# Altium PCB PCB1Good1.PcbDoc (part 1 of 2)
Units mm, origin at the board's own origin, x right, y up, seen from the top; angles counter-clockwise.
Board outline 152.4 x 101.6 mm, 2 copper layers (Top Layer, Bottom Layer); 118 components, 130 nets, 525 pads, 93 vias.
Unrouted connection lines stored in the file: 31.
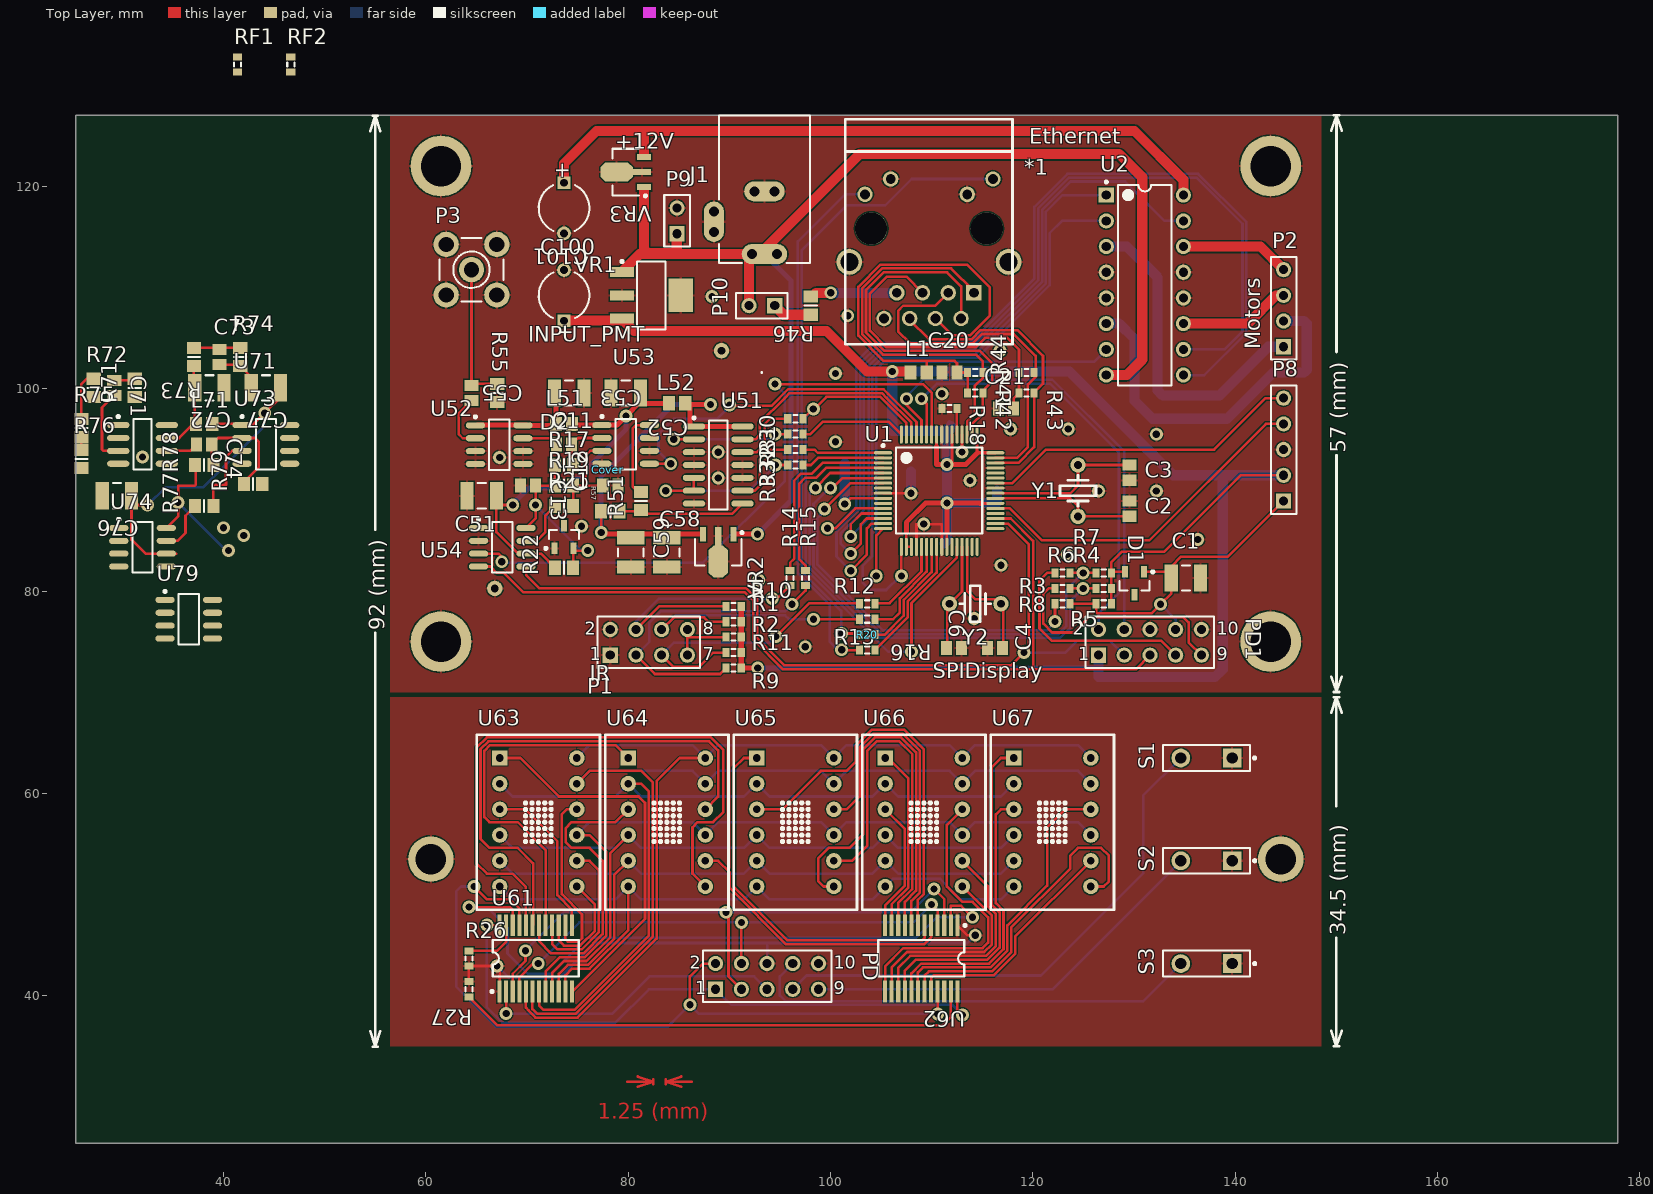
[diagram p0: Top Layer view]
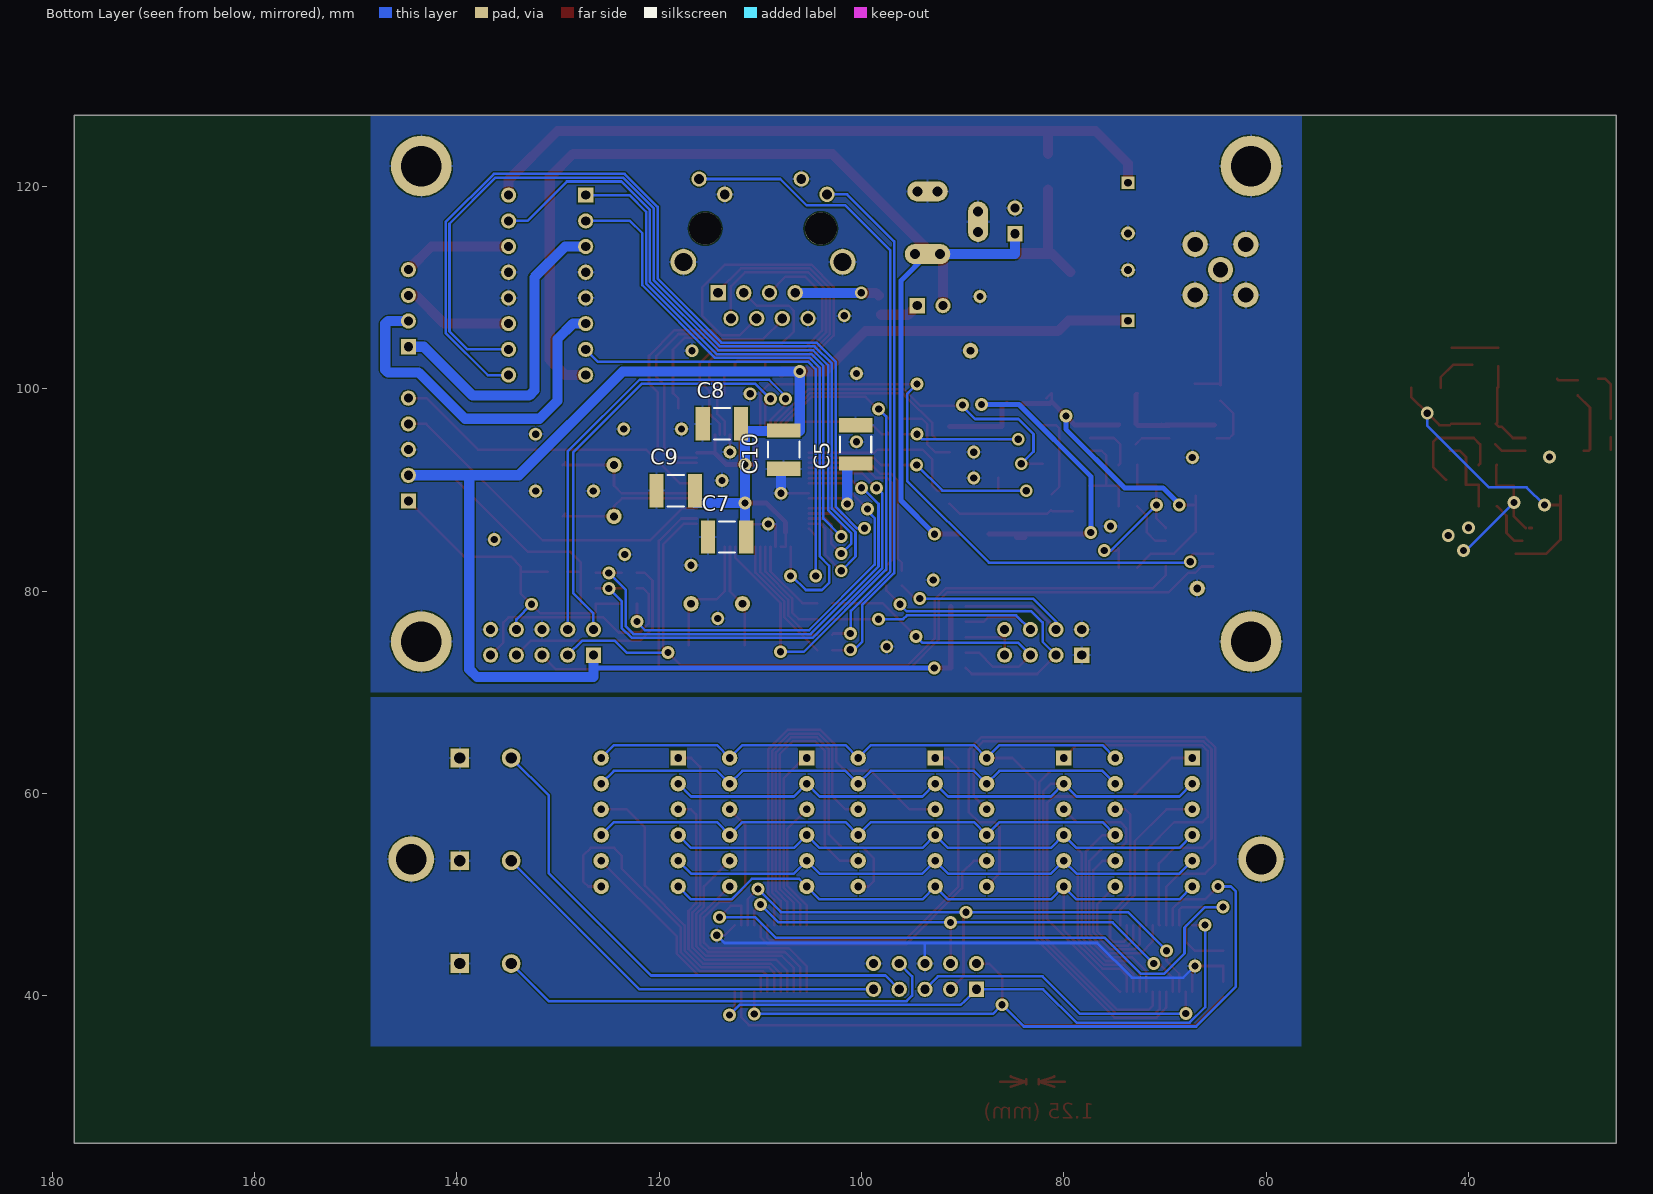
[diagram p1: Bottom Layer view, seen from below]

## Layer stack, top to bottom
Top Layer: signal copper 0.0356
Dielectric: dielectric 0.32, FR-4, Dk 4.8
Bottom Layer: signal copper 0.0356

## Board outline
25.4,25.4 177.8,25.4 177.8,127 25.4,127

## Design rules (kind name [scope] priority, off if disabled: settings)
Clearance [All] p1: gap=0.127
PolygonConnect [All] p1: connectstyle=Relief reliefconductorwidth=0.254 reliefentries=4 polygonreliefangle="90 Angle"
RoutingVias [All] p1: holewidth=0.711 width=1.27 viastyle="Through Hole" minholewidth=0.711 minwidth=1.27 maxholewidth=0.711 maxwidth=1.27
SilkscreenOverComponentPads [All] p1: minsilkscreentomaskgap=0.254
SolderMaskExpansion [All] p1: expansion=0.102
Width [All] p1: maxlimit=2.54 minlimit=0.254 preferedwidth=0.254
27 further rules are at their usual default settings.

## Classes and differential pairs
component class Sheet1: * *1 *2 *3 *4 *5 *6 *7 *8 C1 C2 C3 C4 C5 C6 C7 C8 C9 C10 C11 C12 C13 C51 C52 C53 C55 C58 C59 C100 C101 D1 D2 J1 J2 L51 L52 P1 P2 P3 P8 Q1 Q2 R1 R2 R3 R4 R5 R6 R7 R8 R9 R10 R11 R12 R13 R14 R15 R16 R17 R18 R19 R20 R21 R22 R23 R24 R25 R51 R55 R57 U1 U2 U3 U4 U51 U52 U53 U54 VR1 VR2 VR3 Y1 Y2

## Components (designator, comment, footprint, x,y, rotation, side; value= is the part's Value field where it differs from the comment)
*1 "Component_1" EthernetCON 109.728,115.824 r90 top
C1 "Cap" CAPC3225N 135.128,81.28 r180 top
C2 "Cap" CAPC2012L 129.54,88.138 r270 top
C3 "Cap" CAPC2012L 129.54,91.694 r270 top
C4 "Cap" CAPC2012L 116.259,74.357 r180 top
C5 "Cap" CAPC4532L 100.584,94.488 r90 bottom
C6 "Cap" CAPC2012L 112.195,74.357 r180 top
C7 "Cap" CAPC4532L 113.284,85.344 r180 bottom
C8 "Cap" CAPC4532L 113.792,96.52 r180 bottom
C9 "Cap" CAPC4532L 118.364,89.916 r180 bottom
C10 "Cap" CAPC4532L 107.696,93.98 r90 bottom
C11 "Cap" CAPC2012L 73.66,94.488 r0 top
C12 "Cap" CAPC2012L 78.232,90.424 r180 top
C13 "Cap" CAPC2012L 70.104,90.424 r0 top
C20 "Cap" CAPC2012L 111.76,101.6 r0 top
C21 "Cap" CAPC2012L 117.348,98.044 r0 top
C51 "Cap Pol1" CAPC3225N 65.532,89.408 r180 top
C52 "Cap" CAPC3225N 79.756,99.568 r180 top
C53 "Cap" CAPC3225N 74.168,99.568 r180 top
C55 "Cap" CAPC2012L 64.516,99.568 r270 top
C58 "Cap" CAPC3225N 83.82,83.82 r90 top
C59 "Cap Pol1" CAPC3225N 80.264,83.82 r270 top
C71 "Cap" CAPC2012L 29.206,100.076 r270 top
C72 "Cap" CAPC3225N 38.608,100.076 r180 top
C73 "Cap" CAPC2012L 39.624,103.124 r90 top
C74 "Cap" CAPC2012L 38.1,94.488 r0 top
C76 "Cap Pol1" CAPC3225N 29.464,89.408 r180 top
C77 "Cap" CAPC3225N 44.196,100.076 r180 top
C100 "Cap Pol1" CAPPR5-5x5 73.66,109.22 r90 top
C101 "Cap Pol1" CAPPR5-5x5 73.66,117.856 r270 top
Cover "Cover" Cover 77.724,92.456 r0 top
D1 "Diode" SOT95P240-3N 130.048,80.772 r270 top
D2 "AD1580" SOT95P240-3N 73.66,85.344 r90 top
J1 "PWR2.5" KLD-0202 93.472,127 r270 top
L1 "Inductor" INDC2012L 108.712,101.6 r0 top
L51 "Inductor" INDC2012L 73.66,96.52 r0 top
L52 "Inductor" INDC2012L 84.836,98.552 r0 top
L71 "Inductor" INDC2012L 38.1,96.52 r0 top
P1 "Header 4X2" HDR2X4 78.232,73.66 r0 top
P2 "Header 4" HDR1X4 144.78,104.14 r90 top
P3 "SMB" SMB_V-RJ45 64.516,111.76 r0 top
P8 "Header 5" HDR1X5 144.78,88.9 r90 top
P9 "Header 2" HDR1X2 84.836,115.316 r90 top
P10 "Header 2" HDR1X2 94.488,108.204 r180 top
PD "Header 5X2" HDR2X5 88.646,40.64 r0 top
PD1 "Header 5X2" HDR2X5 126.492,73.66 r0 top
R1 "Res3" RESC1608L 90.424,78.486 r0 top
R2 "Res3" RESC1608L 90.424,76.962 r0 top
R3 "Res3" RESC1608L 122.936,80.264 r180 top
R4 "Res3" RESC1608L 127,80.264 r0 top
R5 "Res3" RESC1608L 127,78.74 r0 top
R6 "Res3" RESC1608L 122.936,81.788 r0 top
R7 "Res3" RESC1608L 127,81.788 r0 top
R8 "Res3" RESC1608L 122.936,78.74 r0 top
R9 "Res3" RESC1608L 90.424,72.39 r0 top
R10 "Res3" RESC1608L 90.424,73.914 r0 top
R11 "Res3" RESC1608L 90.424,75.438 r0 top
R12 "Res3" RESC1608L 103.632,78.74 r0 top
R13 "Res3" RESC1608L 103.632,77.216 r0 top
R14 "Res3" RESC1608L 96.012,81.28 r90 top
R15 "Res3" RESC1608L 97.536,81.28 r90 top
R16 "Res3" RESC1608L 103.632,74.168 r0 top
R17 "Res2" RESC2012N 73.66,92.456 r0 top
R18 "Res3" RESC1608L 111.76,98.044 r0 top
R19 "Res2" RESC2012N 73.66,90.424 r0 top
R20 "Res3" RESC1608L 103.632,75.692 r0 top
R21 "Res2" RESC2012N 73.66,88.392 r0 top
R22 "Res2" RESC2012N 73.66,82.296 r180 top
R26 "Res3" RESC1608L 64.262,43.688 r90 top
R27 "Res3" RESC1608L 64.262,40.64 r270 top
R30 "" RESC1608L 96.52,97.028 r180 top
R31 "" RESC1608L 96.52,95.504 r180 top
R32 "" RESC1608L 96.52,93.98 r180 top
R33 "" RESC1608L 96.52,92.456 r180 top
R41 "Res3" RESC1608L 114.3,101.6 r0 top
R42 "Res3" RESC1608L 114.3,99.568 r0 top
R43 "Res3" RESC1608L 119.38,99.568 r0 top
R44 "Res3" RESC1608L 119.38,101.6 r180 top
R46 "Res3" RESC2012N 98.044,108.204 r270 top
R51 "Res2" RESC2012N 81.28,88.9 r90 top
R55 "Res2" RESC2012N 67.056,99.568 r90 top
R57 "Res2" RESC2012N 78.232,87.884 r0 top
R71 "Res2" RESC2012N 31.238,100.076 r90 top
R72 "Res2" RESC2012N 27.174,100.076 r90 top
R73 "Res2" RESC2012N 37.084,103.124 r270 top
R74 "Res2" RESC2012N 41.656,103.124 r90 top
R75 "Res2" RESC2012N 25.958,96.108 r90 top
R76 "Res2" RESC2012N 25.958,93.06 r90 top
R77 "Res2" RESC2012N 38.1,88.392 r180 top
R78 "Res2" RESC2012N 38.1,92.456 r180 top
R79 "Res2" RESC2012N 42.935,90.571 r180 top
RF1 "Res3" RESC1608L 41.405,132.046 r90 top
RF2 "Res3" RESC1608L 46.655,132.046 r90 top
S1 "SW-PB" SPST-2 137.16,63.5 r180 top
S2 "SW-PB" SPST-2 137.16,53.34 r180 top
S3 "SW-PB" SPST-2 137.16,43.18 r180 top
U1 "PIC18F67J60-I/PT" TQFP-PT64_N 110.744,89.916 r0 top
U2 "SN754410NE" NE016 131.064,110.236 r0 top
U51 "SN74S197D" D014_N 88.9,92.456 r0 top
U52 "SA5205A" SOIC127P600-8L 67.252,94.465 r0 top
U53 "AD8561" SOIC127P600-8L 79.756,94.488 r0 top
U54 "AD8400" SOIC127P600-8L 67.564,84.328 r0 top
U61 "STP16C596" DB024 70.866,43.688 r0 top
U62 "STP16C596" DB024 108.966,43.688 r180 top
U63 "BL-M07A571" "LED matrix 7x5" 67.31,63.5 r0 top
U64 "BL-M07A571" "LED matrix 7x5" 80.01,63.5 r0 top
U65 "BL-M07A571" "LED matrix 7x5" 92.71,63.5 r0 top
U66 "BL-M07A571" "LED matrix 7x5" 105.41,63.5 r0 top
U67 "BL-M07A571" "LED matrix 7x5" 118.11,63.5 r0 top
U71 "AD8001AR" SO-8_N 32.004,94.488 r0 top
U73 "AD8561" SOIC127P600-8L 44.196,94.488 r0 top
U74 "AD8400" SOIC127P600-8L 32.004,84.328 r0 top
U79 "AD8400" SOIC127P600-8L 36.576,77.216 r0 top (schematic designator U74)
VR1 "Volt Reg" SOT223-4N 82.296,109.22 r0 top
VR2 "Volt Reg" SOT89N#1 88.9,83.82 r270 top
VR3 "Volt Reg" SOT89N#2 79.756,121.412 r180 top
Y1 "XTAL" Quartz 124.46,92.456 r270 top
Y2 "Z" Quartz 116.84,78.74 r180 top

## Footprints (in the part's own frame and the unit in brackets; to place one, negate y for a bottom-side part, rotate by r counter-clockwise, add the part's x,y. Pads: shape width x height; smd on the part's side, far side on the other; paste and mask are expansions set on the pad)
CAPC2012L [mm] "Chip Capacitor, Body 2.0x1.3mm, IPC High Density"
  rect 1.1x1.4 smd: 1(-0.75,0) 2(0.75,0)
  body extent -1.1,-0.72 1.1,0.72, height 1.4
CAPC3225N [mm] "Chip Capacitor, Body 3.2x2.5mm, IPC Medium Density"
  rect 1.3x2.7 smd: 1(-1.45,0) 2(1.45,0)
  silkscreen extent -0.4,-1.25 0.4,1.25, body extent -1.7,-1.35 1.7,1.35, height 1.5
CAPC4532L [mm] "Chip Capacitor, Body 4.5x3.2mm, IPC High Density"
  rect 1.4x3.3 smd: 1(-1.9,0) 2(1.9,0)
  silkscreen extent -0.8,-1.55 0.8,1.55, body extent -2.4,-1.7 2.4,1.7, height 1.4
CAPPR5-5x5 [mm] "Capacitor, Electrolytic, Radial; Body 5 x 5 mm (Dia.xH typ); Pin Spacing 5 mm (typ)"
  rect 1.25x1.25 hole 0.75: 1(-2.5,0)
  round 1.35 hole 0.8: 2(2.5,0)
  silkscreen extent -2.26,-2.5 2.27,2.5
Cover [mil]
  round 60 hole 30: 0(-429.13,-480.32) 1(452.76,444.88)
  body extent -626,-486 646,453, height 181
D014_N [mm] "SOIC, 14-Leads, Body 8.7x3.9mm, Pitch 1.27mm, IPC Medium Density"
  oval 2.2x0.6 smd: 1(-2.4,3.81) 2(-2.4,2.54) 3(-2.4,1.27) 4(-2.4,0) 5(-2.4,-1.27) 6(-2.4,-2.54) 7(-2.4,-3.81) 8(2.4,-3.81) 9(2.4,-2.54) 10(2.4,-1.27) 11(2.4,0) 12(2.4,1.27) 13(2.4,2.54) 14(2.4,3.81)
  silkscreen extent -2.52,-4.4 0.9,4.78, body extent -2,-4.38 2,4.38, height 1.75
DB024 [mm] "SSOP, Plastic; 24 Leads; Body Width 5.3 mm; Pitch 0.65 mm"
  rect 0.4x2.15 smd: 1(-3.575,-3.275) 2(-2.925,-3.275) 3(-2.275,-3.275) 4(-1.625,-3.275) 5(-0.975,-3.275) 6(-0.325,-3.275) 7(0.325,-3.275) 8(0.975,-3.275) 9(1.625,-3.275) 10(2.275,-3.275) 11(2.925,-3.275) 12(3.575,-3.275) 13(3.575,3.275) 14(2.925,3.275) 15(2.275,3.275) 16(1.625,3.275) 17(0.975,3.275) 18(0.325,3.275) 19(-0.325,3.275) 20(-0.975,3.275) 21(-1.625,3.275) 22(-2.275,3.275) 23(-2.925,3.275) 24(-3.575,3.275)
  silkscreen extent -4.45,-3.4 4.25,1.8
EthernetCON [mil] "Ethernet connector w/two LEDs"
  rect 60x60 hole 38: 1(-250,-175)
  round 60 hole 38: 2(-350,-125) 3(-250,-75) 4(-350,-25) 5(-250,25) 6(-350,75) 7(-250,125) 8(-350,175) 9(193,-249) 10(133,-149) 11(193,149) 12(133,249)
  round 100 hole 70: 13(-130,-310) 14(-130,310)
  round 125 hole 125 unplated: 15(0,-225) 16(0,225)
  silkscreen extent -450,-325 425,325, body extent -450,-325 425,325, height 550
HDR1X2 [mm] "Connector; Header; 2 Position"
  rect 1.5x1.5 hole 0.9: 1(0,0)
  round 1.5 hole 0.9: 2(2.54,0)
  silkscreen extent -1.27,-1.27 3.81,1.27
HDR1X4 [mm] "Connector; Header; 4 Position"
  rect 1.5x1.5 hole 0.9: 1(0,0)
  round 1.5 hole 0.9: 2(2.54,0) 3(5.08,0) 4(7.62,0)
  silkscreen extent -1.27,-1.27 8.89,1.27
HDR1X5 [mm] "Connector; Header; 5 Position"
  rect 1.5x1.5 hole 0.9: 1(0,0)
  round 1.5 hole 0.9: 2(2.54,0) 3(5.08,0) 4(7.62,0) 5(10.16,0)
  silkscreen extent -1.27,-1.27 11.43,1.27
HDR2X4 [mm] "Connector; Header; 4x2 Position"
  rect 1.5x1.5 hole 0.9: 1(0,0)
  round 1.5 hole 0.9: 2(0,2.54) 3(2.54,0) 4(2.54,2.54) 5(5.08,0) 6(5.08,2.54) 7(7.62,0) 8(7.62,2.54)
  silkscreen extent -1.27,-1.27 8.89,3.81
HDR2X5 [mm] "Connector; Header; 5x2 Position"
  rect 1.5x1.5 hole 0.9: 1(0,0)
  round 1.5 hole 0.9: 2(0,2.54) 3(2.54,0) 4(2.54,2.54) 5(5.08,0) 6(5.08,2.54) 7(7.62,0) 8(7.62,2.54) 9(10.16,0) 10(10.16,2.54)
  silkscreen extent -1.27,-1.27 11.43,3.81
INDC2012L [mm] "Chip Inductor, Body 2.0x1.2mm, IPC High Density"
  rect 1.2x1.4 smd: 1(-0.8,0) 2(0.8,0)
  body extent -1.1,-0.7 1.1,0.7, height 0.55
KLD-0202 [mm] "DC Power Jack, 2.5mm, KLD Series, PCB Mount"
  oval 2x4.5 all layers, no hole: 1(13.7,0)
  round 1.5 hole 1: 1A(13.7,-1.25) 1B(13.7,1.25) 2A(7.5,-1) 2B(7.5,1) 3A(9.5,-5) 3B(11.5,-5)
  oval 2x4 all layers, no hole: 2(7.5,0)
  oval 4x2 all layers, no hole: 3(10.5,-5)
  silkscreen extent 0,-4.5 14.6,4.5
"LED matrix 7x5" [mil] "LED matrix 7x5"
  rect 60x60 hole 30: 1(0,0)
  round 60 hole 30: 2(0,-100) 3(0,-200) 4(0,-300) 5(0,-400) 6(0,-500) 7(300,-500) 8(300,-400) 9(300,-300) 10(300,-200) 11(300,-100) 12(300,0)
  silkscreen extent -90,-590 390,90, body extent -90,-590 390,90, height 250
NE016 [mm] "DIP, 16-Leads, Row Spacing 7.62mm, Pitch 2.54mm, Body 19.4x6.35mm"
  rect 1.5x1.5 hole 0.9: 1(-3.81,8.89)
  round 1.5 hole 0.9: 2(-3.81,6.35) 3(-3.81,3.81) 4(-3.81,1.27) 5(-3.81,-1.27) 6(-3.81,-3.81) 7(-3.81,-6.35) 8(-3.81,-8.89) 9(3.81,-8.89) 10(3.81,-6.35) 11(3.81,-3.81) 12(3.81,-1.27) 13(3.81,1.27) 14(3.81,3.81) 15(3.81,6.35) 16(3.81,8.89)
  silkscreen extent -3.93,-9.9 2.65,10.31, body extent -3.3,-9.9 3.3,9.9, height 5.08
Quartz [mil]
  round 60 hole 30: 1(0,0) 2(200,0)
  silkscreen extent 40,-70 160,70, body extent -100,-100 300,100, height 90
RESC1608L [mm] "Chip Resistor, Body 1.6x0.8mm, IPC High Density"
  rect 0.7x0.9 smd: 1(-0.75,0) 2(0.75,0)
  silkscreen extent -0.2,-0.35 0.2,0.35, body extent -0.85,-0.48 0.85,0.48, height 0.9
RESC2012N [mm] "Chip Resistor, Body 2.0x1.2mm, IPC Medium Density"
  rect 1.2x1.4 smd: 1(-0.9,0) 2(0.9,0)
  silkscreen extent 0,-0.6 0,0.6, body extent -1.07,-0.7 1.07,0.7, height 0.7
SMB_V-RJ45 [mm] "Connector; SMB Straight"
  round 2.5 hole 1.5: 1(0,0) 2(-2.5,-2.5) 2_1(2.5,-2.5) 2_2(2.5,2.5) 2_3(-2.5,2.5)
  silkscreen extent -3.15,-3.15 3.15,3.15
SO-8_N [mm] "SOIC, 8-Leads, Body 4.9x3.9mm, Pitch 1.27mm, IPC Medium Density"
  oval 2.2x0.6 smd: 1(-2.4,1.905) 2(-2.4,0.635) 3(-2.4,-0.635) 4(-2.4,-1.905) 5(2.4,-1.905) 6(2.4,-0.635) 7(2.4,0.635) 8(2.4,1.905)
  silkscreen extent -2.52,-2.5 0.9,2.88, body extent -1.95,-2.45 1.95,2.45, height 1.75
SOIC127P600-8L [mm] "SOIC, 8-Leads, Body 4.9x3.9mm, Pitch 1.27mm, IPC High Density"
  oval 1.9x0.6 smd: 1(-2.35,1.905) 2(-2.35,0.635) 3(-2.35,-0.635) 4(-2.35,-1.905) 5(2.35,-1.905) 6(2.35,-0.635) 7(2.35,0.635) 8(2.35,1.905)
  silkscreen extent -2.47,-2.5 1,2.88, body extent -2,-2.5 2,2.5, height 1.75
SOT89N#1 [mm] "SOT89, 3-Leads, Body 4.5x2.4 mm, Pitch 1.5mm, Lead Span 4.1mm, IPC Medium Density"
  rect 1.4x0.6 smd: 1(-1.8,1.5) 3(-1.8,-1.5)
  rect 1.8x0.6 smd: 2(-1.6,0)
  oct 3.2x1.9 smd: 2_1(0.9,0)
  silkscreen extent -2.07,-2.3 1.3,2.48, body extent -1.3,-2.3 1.3,2.3, height 1.6
SOT89N#2 [mm] "SOT89, 3-Leads, Body 4.5x2.4 mm, Pitch 1.5mm, Lead Span 4.1mm, IPC Medium Density"
  rect 1.4x0.6 smd: 1(-1.8,1.5) 3(-1.8,-1.5)
  oct 3.2x1.9 smd: 2(0.9,0)
  rect 1.8x0.6 smd: 2_1(-1.6,0)
  silkscreen extent -2.07,-2.3 1.3,2.47, body extent -1.3,-2.3 1.3,2.3, height 1.6
SOT95P240-3N [mm] "SOT23, 3-Leads, Body 2.9x1.3mm, Pitch 0.95mm, Lead Span 2.4mm, IPC Medium Density"
  rect 1.15x0.6 smd: 1(-1.125,0.95) 2(-1.125,-0.95) 3(1.125,0)
  silkscreen extent -1.25,-1.5 0.7,1.93, body extent -0.7,-1.5 0.7,1.5, height 1.14
SOT223-4N [mm] "SOT223, 4-Leads, Body 6.5x3.5mm, Pitch 2.3mm, Lead Span 7mm, IPC Medium Density"
  rect 2.4x1 smd: 1(-2.9,2.3) 2(-2.9,0) 3(-2.9,-2.3)
  rect 2.4x3.3 smd: 4(2.9,0)
  silkscreen extent -3.02,-3.35 1.4,3.47, body extent -1.85,-3.35 1.85,3.35, height 1.7
SPST-2 [mm] "Circuit Breaker; 2 Leads"
  rect 1.85x1.85 hole 1.1: 1(-2.54,0)
  round 1.85 hole 1.1: 2(2.54,0)
  silkscreen extent -4.89,-1.27 4.28,1.27
TQFP-PT64_N [mm] "Thin QFP, 64-Leads, Body 10x10mm, Pitch 0.5mm, IPC Medium Density"
  oval 1.8x0.3 smd: 1(-5.55,3.75) 2(-5.55,3.25) 3(-5.55,2.75) 4(-5.55,2.25) 5(-5.55,1.75) 6(-5.55,1.25) 7(-5.55,0.75) 8(-5.55,0.25) 9(-5.55,-0.25) 10(-5.55,-0.75) 11(-5.55,-1.25) 12(-5.55,-1.75) 13(-5.55,-2.25) 14(-5.55,-2.75) 15(-5.55,-3.25) 16(-5.55,-3.75) 33(5.55,-3.75) 34(5.55,-3.25) 35(5.55,-2.75) 36(5.55,-2.25) 37(5.55,-1.75) 38(5.55,-1.25) 39(5.55,-0.75) 40(5.55,-0.25) 41(5.55,0.25) 42(5.55,0.75) 43(5.55,1.25) 44(5.55,1.75) 45(5.55,2.25) 46(5.55,2.75) 47(5.55,3.25) 48(5.55,3.75)
  oval 0.3x1.8 smd: 17(-3.75,-5.55) 18(-3.25,-5.55) 19(-2.75,-5.55) 20(-2.25,-5.55) 21(-1.75,-5.55) 22(-1.25,-5.55) 23(-0.75,-5.55) 24(-0.25,-5.55) 25(0.25,-5.55) 26(0.75,-5.55) 27(1.25,-5.55) 28(1.75,-5.55) 29(2.25,-5.55) 30(2.75,-5.55) 31(3.25,-5.55) 32(3.75,-5.55) 49(3.75,5.55) 50(3.25,5.55) 51(2.75,5.55) 52(2.25,5.55) 53(1.75,5.55) 54(1.25,5.55) 55(0.75,5.55) 56(0.25,5.55) 57(-0.25,5.55) 58(-0.75,5.55) 59(-1.25,5.55) 60(-1.75,5.55) 61(-2.25,5.55) 62(-2.75,5.55) 63(-3.25,5.55) 64(-3.75,5.55)
  silkscreen extent -5.67,-4.25 4.25,4.57, body extent -5,-5 5,5, height 1.2

## Part data
C1 C2 C3 C4 C5 C6 C7 C8 C9 C10 C11 C12 C13 C20 C21 C52 C53 C55 C58 C71 C72 C73 C74 C77: "Capacitor"
C51 C59 C76 C100 C101: "Polarized Capacitor (Radial)"
Cover: library part Component_1
D1: "Default Diode"
D2: library part "D Zener", "Zener Diode"
J1: "Low Voltage Power Supply Connector"
P1: "Header, 4-Pin, Dual row"
P2: "Header, 4-Pin"
P3: "SMB Straight Connector"
P8: "Header, 5-Pin"
P9 P10: "Header, 2-Pin"
PD PD1: "Header, 5-Pin, Dual row"
R1 R2 R3 R4 R5 R6 R7 R8 R9 R10 R11 R12 R13 R14 R15 R16 R17 R18 R19 R20 R21 R22 R26 R27 R41 R42 R43 R44 R46 R51 R55 R57 R71 R72 R73 R74 R75 R76 R77 R78 R79 RF1 RF2: "Resistor"
R30 R31 R32 R33: library part Res3, "Resistor"
S1 S2 S3: "Switch"
U1: "High Performance, 1-Mbit Flash Microcontroller with Ethernet, 128K Flash, 64-Pin TQFP, Industrial Temperature Range"
U2: "Quadruple Half-H Driver"
U51: "100-MHz Presettable Decade or Binary Counter / Latch"
U52: "Wide-band high-frequency amplifier"
U53 U73: "Ultrafast 7 ns  Single Supply Comparator"
U54 U74 U79: "Digital Potentiometers"
U71: "800MHz, 50mW Current Feedback Amplifier"
VR1 VR2 VR3: "Voltage Regulator"
Y1: "Crystal Oscillator"
Y2: library part XTAL, "32768 kHz"

## Free pads (board coordinates)
  round 4.5 hole 3: 0(60.5,53.5) 0(144.5,53.5)
  round 6 hole 4: 0(61.5,75) 0(61.5,122) 0(143.5,75) 0(143.5,122)

## Via types
v1: diameter 1.27, hole 0.711, Top Layer to Bottom Layer, 92 vias
v2: diameter 1.27, hole 0.711, Top Layer to Bottom Layer, tented top, 1 vias

## Nets (pads, with @x,y where several pads share a name; then routed paths per layer and width w, separated by ;. In a path a pad name is that pad's centre, name@x,y a point inside that pad or via, vN(x,y) a via of type N, cw(c..) or ccw(c..) an arc to the next point about the centre after c; other vN are vias at no path point)
3.3V: C7.2 C8.2 C9.2 C10.2 C100.1 D1.2 L1.1 P8.2 PD1.1 R1.2 R2.2 R4.2 R5.2 R7.2 R9.2 R10.2 R11.2 U1.18 U1.19 U1.26 U1.38 U1.48 U1.49 U1.54 U1.57 VR1.3 | length 243.8
  Top Layer w0.254: 107.494,85.789 U1.18@107.494,84.366 U1.19@107.994,84.366 ; U1.26@111.494,84.366 111.5,84.372 111.5,85.8 ; U1.49@114.494,94.802 U1.49@114.494,95.466 ; R5.2@127.75,78.74 R4.2@127.75,80.264 R7.2@127.75,81.788 ; D1.2@129.098,81.897 127.859,81.897 R7.2@127.75,81.788 ; P8.2@144.78,91.44 140.54,91.44 133,83.9 128.8,83.9 127.75,82.85 R7.2@127.75,81.788
  Top Layer w0.3: 110.494,94.3 U1.57@110.494,95.466 ; 111.994,93.1 111.994,92.5 U1.54@111.994,95.466 ; 114.494,93.7 U1.49@114.494,95.466 ; 114.528,93.666 U1.48@116.294,93.666 ; 114.8,88.666 U1.38@116.294,88.666
  Top Layer w0.5: R1.2@91.174,78.486 R2.2@91.174,76.962 R11.2@91.174,75.438 R10.2@91.174,73.914 R9.2@91.174,72.39 v1(92.8,72.39) ; 107.494,85.789 107.494,86.794 109.4,88.7 v1(111.5,88.7) ; 110.494,94.3 110.494,92.5 111.994,92.5 113.362,92.5 114.528,93.666 ; 111.5,85.8 v1(111.5,88.7) ; 114.8,88.666 114.766,88.7 v1(111.5,88.7)
  Top Layer w1: C100.1@73.66,106.72 79.538,106.72 79.542,106.724 80.566,105.7 99.6,105.7 103.6,101.7 v1(106.1,101.7) ; v1@106.2,101.6 v1(106.1,101.7) ; L1.1@107.912,101.6 107.812,101.7 v1(106.1,101.7)
  Bottom Layer w0.5: v1(92.8,72.39) 126.482,72.39 126.492,72.4
  Bottom Layer w0.508: C8.2@111.76,95.8 C8.2@111.76,96.652 ; C8.2@111.892,96.292 C8.2@111.892,96.52
  Bottom Layer w1: C7.2@111.252,84.704 111.5,84.952 v1(111.5,88.7) ; C8.2@111.76,95.8 106.1,95.8 v1(106.1,101.7) 123.6,101.7 133.86,91.44 138.46,91.44 ; C8.2@111.892,96.292 111.5,95.9 111.5,93.1 v1(111.5,88.7) ; C9.2@116.464,89.916 116.464,88.7 v1(111.5,88.7) ; PD1.1@126.492,73.66 126.492,72.4 126.492,71.5 138,71.5 138.76,72.26 138.76,91.14 138.46,91.44 ; P8.2@144.78,91.44 138.46,91.44
  other v1: 111.5,92.5
5V: C101.1 U2.16 VR3.3 | length 70.2
  Top Layer w1: C101.1@73.66,120.356 73.66,122.26 76.876,125.476 81.556,125.476 ; VR3.3@81.556,123.2 81.556,125.476 ; U2.16@134.874,119.126 134.874,120.65 130.048,125.476 81.556,125.476
5VHF: C58.2 C59.1 L52.2 R57.1 U51.1 U51.14 VR2.3 | length 43.4
  Top Layer w0.254: R57.1@77.332,87.884 v1(77.332,85.8) 77.332,85.368 v1@77.43,85.27
  Top Layer w0.5: v1(77.332,85.8) 77.512,85.62 VR2.3@87.4,85.62 ; C58.2@84.17,85.62 C58.2@83.82,85.27 C58.2@84.67,85.27 ; L52.2@85.636,98.552 85.763,98.425 L52.2@86.116,98.425 ; v1(88.138,98.425) L52.2@86.116,98.425 ; U51.14@91.3,96.266 86.116,96.266 L52.2@86.116,98.425
  Bottom Layer w0.254: v1(77.332,85.8) 77.356,85.8 v1@77.4,85.844
  Bottom Layer w0.5: v1(77.332,85.8) 77.332,91.332 84.425,98.425 v1(88.138,98.425)
  other v1: 42,85.5
12V: J1.1 J1.1A J1.1B P9.1 P10.2 U2.8 VR1.1 VR2.1 VR3.1 | length 140.2
  Top Layer w0.5: VR2.1@90.4,85.62 v1(92.78,85.62) v1@92.8,85.6
  Top Layer w0.508: J1.1A@92.222,113.3 J1.1@93.472,113.3
  Top Layer w1: VR1.1@79.346,111.52 81.126,113.3 84.2,113.3 ; VR3.1@81.556,119.7 81.556,113.8 81.976,113.38 84.12,113.38 84.2,113.3 ; P9.1@84.836,115.316 84.8,115.28 84.8,113.3 ; P10.2@91.948,108.204 91.948,113.026 J1.1A@92.222,113.3 84.8,113.3 ; J1.1@93.472,113.3 93.472,113.772 102.89,123.19 128.524,123.19 130.81,120.904 130.81,102.87 129.286,101.346 U2.8@127.254,101.346 ; 84.2,113.3 84.8,113.3
  Bottom Layer w0.5: J1.1A@92.222,113.3 J1.1@93.472,113.3 96.1,110.672 96.1,88.94 v1(92.78,85.62)
  Bottom Layer w1: P9.1@84.836,115.316 84.836,113.3 J1.1@93.472,113.3
COUNTERRESET: U1.62 U51.13 | length 21.7
  Top Layer w0.254: U51.13@91.3,94.996 92.596,94.996 93,95.4 93,96.6 95.5,99.1 95.962,99.562 105.077,99.562 105.539,99.1 107.994,96.645 U1.62@107.994,95.466
D0: R33.2 U51.5 U51.6 | length 17.2
  Top Layer w0.254: v1(83.72,89.916) U51.6@86.5,89.916 U51.5@86.5,91.186 ; v1(94.544,92.456) R33.2@95.77,92.456
  Bottom Layer w0.254: v1(83.72,89.916) 92.004,89.916 v1(94.544,92.456)
D1: R32.2 U51.9 | length 8.7
  Top Layer w0.254: U51.9@92.316,89.916 U51.9@91.3,89.916 92.516,89.916 93,90.4 93,93 93.98,93.98 R32.2@95.77,93.98
D2: R31.2 U51.2 | length 13.5
  Top Layer w0.254: v1(84.504,94.996) U51.2@86.5,94.996 ; v1(94.504,95.504) R31.2@95.77,95.504
  Bottom Layer w0.254: v1(84.504,94.996) 93.996,94.996 v1(94.504,95.504)
D3: R30.2 U51.12 | length 7
  Top Layer w0.254: U51.12@91.3,93.726 92.726,93.726 93.5,94.5 93.5,96.5 94.028,97.028 R30.2@95.77,97.028
DISP_LE: PD1.2 U1.59 | length 45
  Top Layer w0.254: v1(109,99) 109.494,98.506 U1.59@109.494,95.466
  Bottom Layer w0.254: v1(109,99) 110.5,100.5 121.7,100.5 128.5,93.7 128.5,79.8 126.492,77.792 PD1.2@126.492,76.2
DISPOFF: PD1.4 U1.60 | length 47.1
  Top Layer w0.254: v1(107.5,99) 107.5,98.4 108.994,96.906 U1.60@108.994,95.466
  Bottom Layer w0.254: v1(107.5,99) 107.5,99.25 109.131,100.881 121.919,100.881 129.032,93.768 PD1.4@129.032,76.2
ENABLECOUNT: U1.61 U53.5 U73.5 | length 35.7
  Top Layer w0.254: U53.5@82.106,92.583 v1(84.201,92.583) ; v1@90,98.679 90.379,98.3 94.161,98.3 95.804,99.943 96.642,99.943 105.235,99.943 105.678,99.5 108.494,96.684 U1.61@108.494,95.466
  Bottom Layer w0.254: v1(84.201,92.583) 83,93.784 83,95.5 84.5,97 88.768,97 90,98.232 v1(90,98.4)
GND: *1.8 *1.10 *1.11 *1.13 *1.14 C1.1 C2.1 C3.2 C4.2 C5.2 C6.1 C7.1 C8.1 C9.1 C10.1 C12.1 C13.1 C20.1 C21.1 C51.2 C52.2 C53.1 C58.1 C59.2 C72.1 C73.1 C76.2 C77.2 C100.2 C101.2 Cover.0 Cover.1 D2.1 J1.2 J1.2A J1.2B J1.3 J1.3A J1.3B P1.1 P1.2 P3.2 P3.2_1 P3.2_2 P3.2_3 P8.3 P9.2 pad.0 PD1.6 PD1.10 PD.6 PD.10 R18.1 R26.1 R27.1 R55.1 R71.1 R74.1 R79.1 S1.1 S2.1 S3.1 U1.9 U1.20 U1.25 U1.41 U1.45 U1.52 U1.55 U1.56 U2.4 U2.5 U2.12 U2.13 U51.3 U51.4 U51.7 U51.10 U51.11 U52.3 U52.4 U52.5 U52.6 U53.4 U53.6 U54.1 U54.2 U61.1 U62.1 U71.4 U73.4 U73.6 U74.1 U74.2 U79.4 VR1.2 VR1.4 VR2.2 VR2.2_1 VR3.2 VR3.2_1 | length 79.3
  Top Layer w0.254: C73.1@39.624,102.374 41.506,102.374 42.746,101.134 C77.2@42.746,100.076 ; R27.1@64.262,41.39 R26.1@64.262,42.938 v1(67.044,42.938) 67.291,42.691 U61.1@67.291,40.413 ; U1.9@105.194,89.666 v1@107.946,89.666 ; U1.20@108.494,84.366 108.494,85.587 108.498,85.591 108.498,86.614 v1(109.22,86.614) 110.994,86.614 U1.25@110.994,84.366 ; U62.1@112.541,46.959 113.532,45.968 v1(114.3,45.974) ; U1.52@112.994,95.466 112.994,93.756 v1(113,93.75)
  Bottom Layer w0.254: v1(67.044,42.938) 68.199,41.783 73.279,41.783 76.708,45.212 93.726,45.212 ; PD.6@93.726,43.18 93.726,45.212 ; C10.1@107.696,92.08 C10.1@107.95,91.826 ; v1(114.3,45.974) 113.538,45.212 98.806,45.212 93.726,45.212
  Bottom Layer w1: v1(107.95,89.662) C10.1@107.95,91.826
  other v1: 97.5,74.5 114.2,77.3 92.9,81.1 116.84,82.55 123.4,83.6 136.3,85.1 40,86.25 75.4,86.4 126.5,89.9 132.2,89.9 113.792,90.932 88.9,91.186 67.3,93.2 32,93.25 88.9,93.726 100.5,94.75 132.2,95.5 117.8,96 123.5,96 111,99.5 100.5,101.5 116.75,103.75 101.7,107.2 88.3,109.1
INPUT: C55.1 C71.1 P3.1 R55.2 R71.2 | length 16.1
  Top Layer w0.254: C71.1@29.206,100.826 31.088,100.826 R71.2@31.238,100.976 ; P3.1@64.516,111.76 C55.1@64.516,100.318 64.666,100.468 R55.2@67.056,100.468
Net*1_1: *1.1 R41.2 U1.51 | length 38.4
  Top Layer w0.254: U1.51@113.494,95.466 113.494,96.744 114.25,97.5 114.25,100.25 115.05,101.05 115.05,102.7 114.393,103.357 109.682,103.357 105.182,103.357 103.124,105.415 103.124,109.913 105.092,111.881 111.924,111.881 114.173,109.632 *1.1@114.173,109.474
Net*1_2: *1.2 R42.2 U1.50 | length 39.7
  Top Layer w0.254: *1.2@112.903,106.934 112.903,110.109 111.512,111.5 105.25,111.5 103.505,109.755 103.505,105.573 105.34,103.738 109.16,103.738 114.762,103.738 116,102.5 116,100.75 115.05,99.8 115.05,97.55 113.994,96.494 U1.50@113.994,95.466
Net*1_3: *1.3 R44.1 U1.47 | length 36
  Top Layer w0.254: 107.832,104.5 111.719,104.5 112.078,104.5 114.078,104.5 114.979,105.401 118.099,105.401 120.262,103.238 120.262,101.176 119.5,100.414 119.5,97.813 119.5,94.227 118.439,93.166 U1.47@116.294,93.166 ; 107.832,104.512 106.68,105.664 106.68,107.696 107.188,108.204 110.363,108.204 *1.3@111.633,109.474
Net*1_4: *1.4 C20.2 L1.2 R41.1 R42.1 | length 45.2
  Top Layer w0.254: L1.2@109.5,101.612 109.5,102.75 ; *1.4@110.363,106.934 112.035,105.262 113.762,105.262 115.75,107.25 115.75,110 113.488,112.262 104.934,112.262 102.743,110.071 102.743,105.257 105.25,102.75 109.5,102.75 ; R42.1@113.55,99.568 113.55,101.45 113.4,101.6 C20.2@112.51,101.6 112.5,101.61 112.5,102.5 112.25,102.75 109.5,102.75
Net*1_5: *1.5 C21.2 R43.1 R44.2 | length 32.5
  Top Layer w0.254: *1.5@109.093,109.474 107.5,111.067 105.567,111.067 103.886,109.386 103.886,105.73 105.497,104.119 114.369,104.119 115.27,105.02 117.48,105.02 118.63,103.87 R44.2@118.63,101.6 R43.1@118.63,99.568 118.098,99.036 C21.2@118.098,98.044
Net*1_6: *1.6 R43.2 U1.46 | length 29.4
  Top Layer w0.254: *1.6@107.823,106.934 107.823,106.807 109.725,104.905 ; 109.725,104.881 111.877,104.881 112.235,104.881 113.92,104.881 114.821,105.782 118.468,105.782 121,103.25 121,100.5 120.13,99.63 120.13,98.001 120.13,94.222 118.574,92.666 U1.46@116.294,92.666
Net*1_7: *1.7 R46.1 | length 8.4
  Top Layer w1: R46.1@98.295,109.205 98.564,109.474 v1(100.026,109.474)
  Bottom Layer w1: v1(100.026,109.474) *1.7@106.553,109.474
Net*1_9: *1.9 R20.1 | length 63.5
  Top Layer w0.254: v1(101.1,75.8) 102.774,75.8 R20.1@102.882,75.692
  Bottom Layer w0.254: v1@101.051,75.751 101.051,78.049 97.149,81.951 97.149,113.659 101.6,118.11 105.41,118.11 108.026,120.726 *1.9@116.053,120.726 ; *1.9@115.824,120.65 *1.9@116.078,120.396
Net*1_12: *1.12 R16.1 | length 52.7
  Top Layer w0.254: v1(101.1,74.2) 101.132,74.168 R16.1@102.882,74.168
  Bottom Layer w0.254: v1(101.1,74.2) 100.7,74.2 99.933,74.967 99.933,78.6 96.768,81.765 96.768,114.548 101.422,119.202 *1.12@103.403,119.202
NetC1_2: C1.2 D1.1 P8.1 PD1.8 R5.1 R8.2 | length 34.2
  Top Layer w0.254: R8.2@123.686,78.74 R5.1@126.25,78.74 126.25,77.95 126.4,77.8 131.7,77.8 v1(132.6,78.7) 133.678,79.778 C1.2@133.678,81.28 C1.2@133.678,81.4 ; D1.1@130.998,81.897 C1.2@133.569,81.897 ; C1.2@133.678,81.788 C1.2@133.678,81.4 ; P8.1@144.78,88.9 139.28,83.4 134.66,83.4 133.678,82.418 C1.2@133.678,81.4
  Bottom Layer w0.254: v1(132.6,78.7) 134.112,77.188 PD1.8@134.112,76.2
NetC2_2: C2.2 U1.39 Y1.2 | length 14.7
  Top Layer w0.254: U1.39@116.294,89.166 123.686,89.166 124.46,88.392 Y1.2@124.46,87.376 C2.2@129.298,87.376 ; C2.2@129.298,87.63 C2.2@129.54,87.388
NetC3_1: C3.1 U1.40 Y1.1 | length 15.7
  Top Layer w0.254: U1.40@116.294,89.666 123.702,89.666 124.46,90.424 Y1.1@124.46,92.456 C3.1@129.274,92.456 ; C3.1@129.274,92.71 C3.1@129.54,92.444
NetC4_1: C4.1 U1.30 Y2.1 | length 12.4
  Top Layer w0.254: U1.30@113.494,84.366 113.494,80.006 114.3,79.2 116.38,79.2 117.082,78.498 C4.1@117.082,74.667
NetC5_1: C5.1 U1.10 | length 8
  Top Layer w0.254: v1(101.4,88.6) 101.966,89.166 U1.10@105.194,89.166 U1.10@105.182,89.154
  Bottom Layer w1: v1(101.4,88.6) C5.1@101.4,92.6
NetC6_2: C6.2 U1.29 Y2.2 | length 10.3
  Top Layer w0.254: C6.2@111.518,74.667 111.518,78.498 Y2.2@111.76,78.74 112.994,79.974 U1.29@112.994,84.366
NetC11_1: C11.1 U52.7 | length 3.6
  Top Layer w0.254: U52.7@69.602,95.1 72.298,95.1 C11.1@72.91,94.488
NetC11_2: C11.2 R17.2 U53.2 | length 5.4
  Top Layer w0.254: R17.2@74.56,92.456 74.41,92.606 C11.2@74.41,94.488 75.045,95.123 U53.2@77.406,95.123
NetC12_2: C12.2 R19.2 R21.2 U53.3 | length 9.7
  Top Layer w0.254: R21.2@74.56,88.392 R19.2@74.56,90.424 C12.2@77.482,90.424 ; 75.8,90.424 75.8,93.4 76.253,93.853 U53.3@77.406,93.853
NetC13_2: C13.2 D2.2 R17.1 R19.1 R22.1 U54.8 | length 19
  Top Layer w0.254: U54.8@69.914,86.314 U54.8@69.914,86.233 70.854,87.173 v1(70.854,88.5) C13.2@70.854,90.424 R19.1@72.76,90.424 ; R19.1@72.71,90.374 R19.1@72.76,90.424 ; R17.1@72.76,92.456 R19.1@72.76,90.424 ; R22.1@74.56,82.296 D2.2@74.56,84.169 ; D2.2@74.61,84.219 74.829,84 v1(76,84)
  Bottom Layer w0.254: v1(70.854,88.5) 75.354,84 v1(76,84)